# Altium PCB PCB2.PcbDoc
Units mil, origin at the board's own origin, x right, y up, seen from the top; angles counter-clockwise.
Board outline 6000 x 4000 mil, 2 copper layers (Top Layer, Bottom Layer); 97 components, 57 nets, 259 pads, 17 vias.
Unrouted connection lines stored in the file: 18.
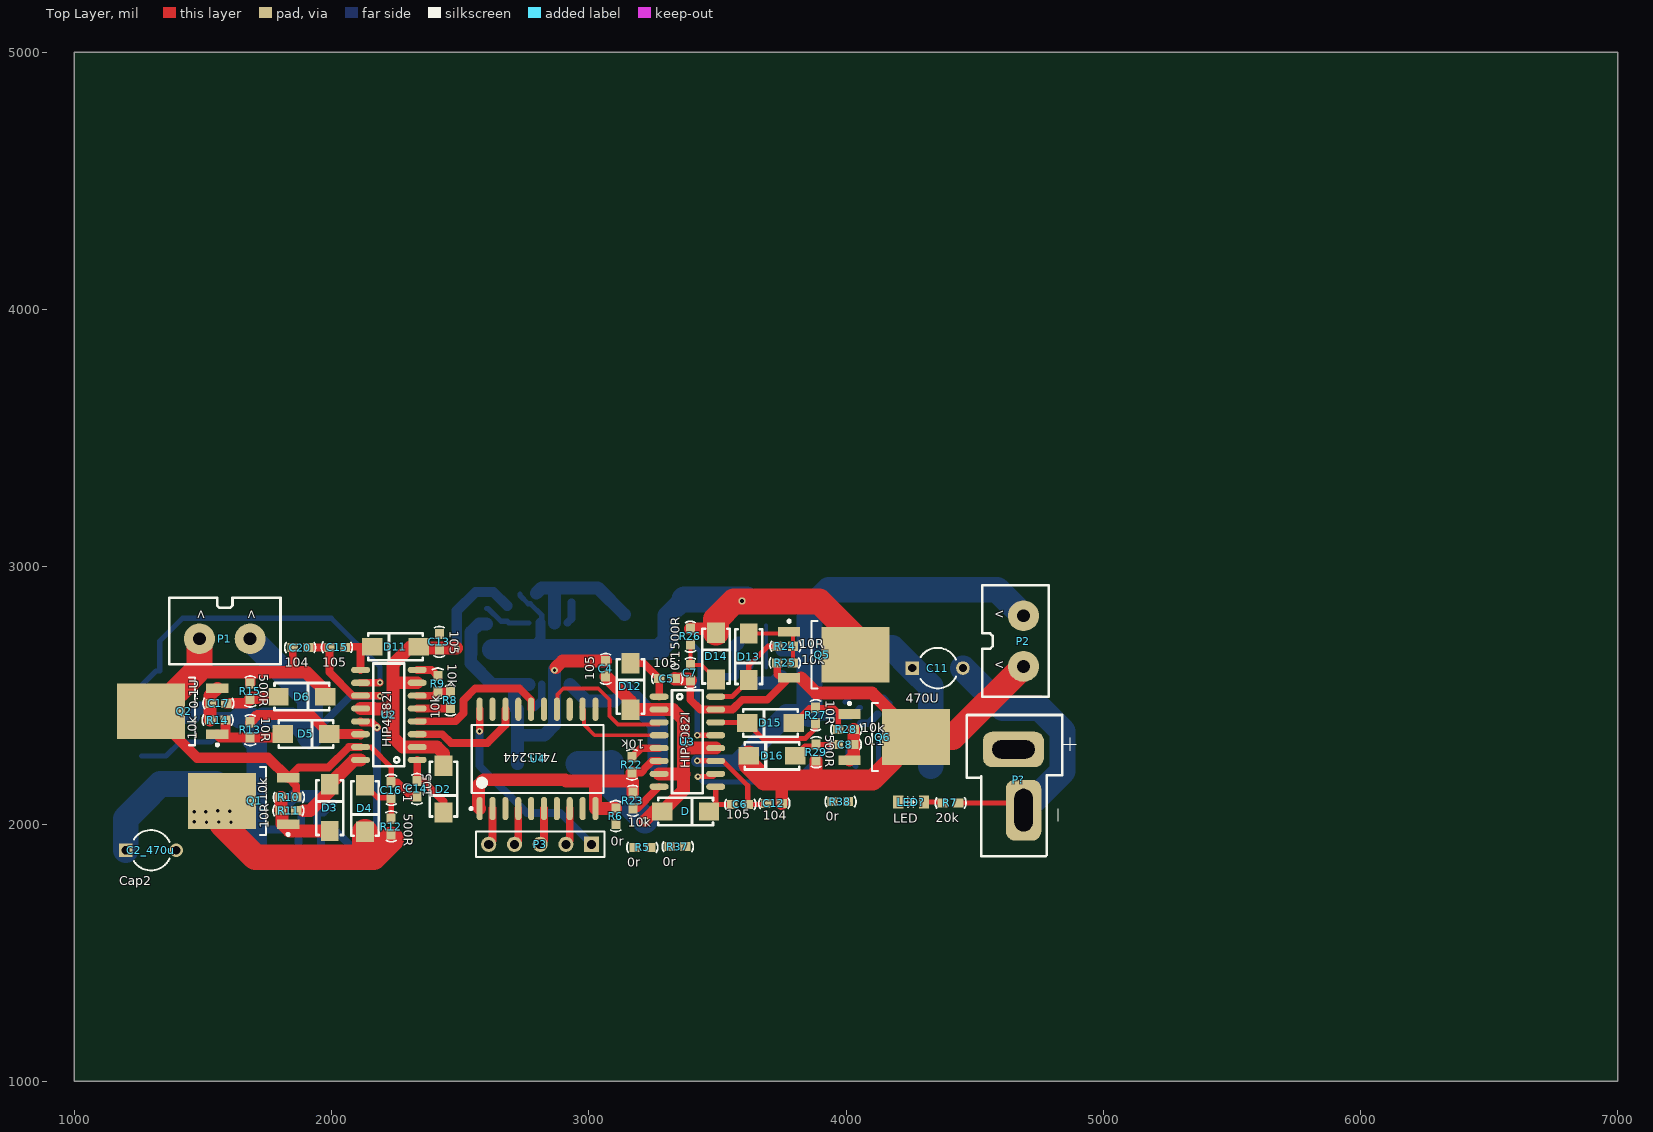
[diagram p0: Top Layer view]
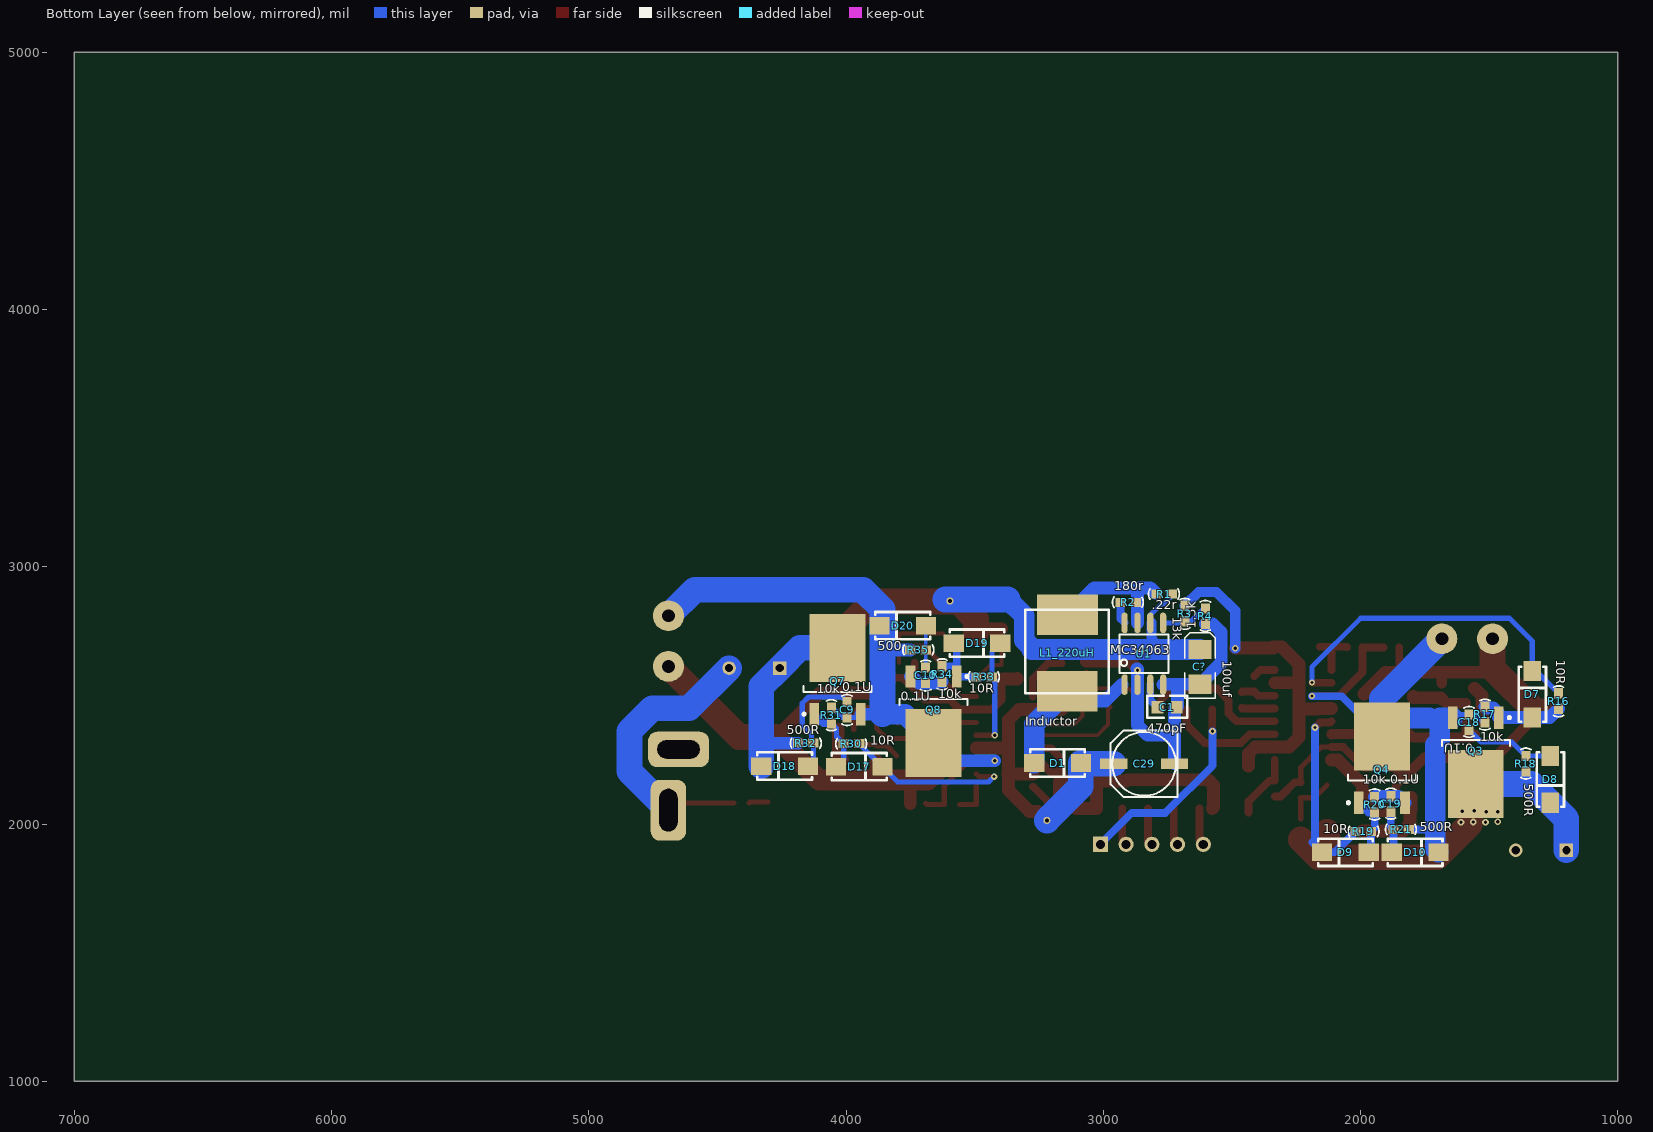
[diagram p1: Bottom Layer view, seen from below]
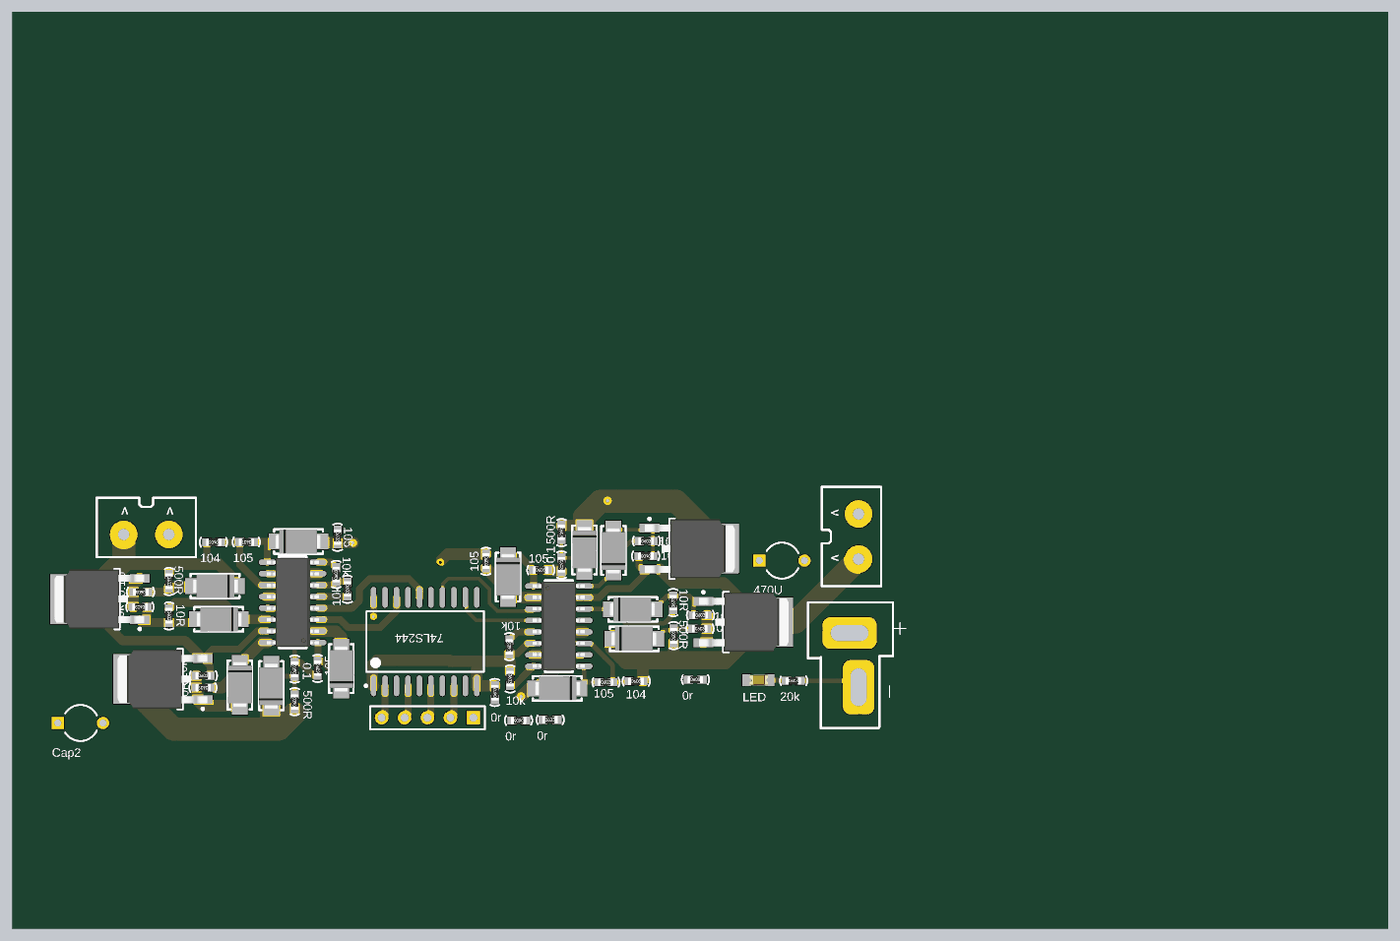
[diagram p2: 3D render of the assembled board from above, using the file's embedded part models]
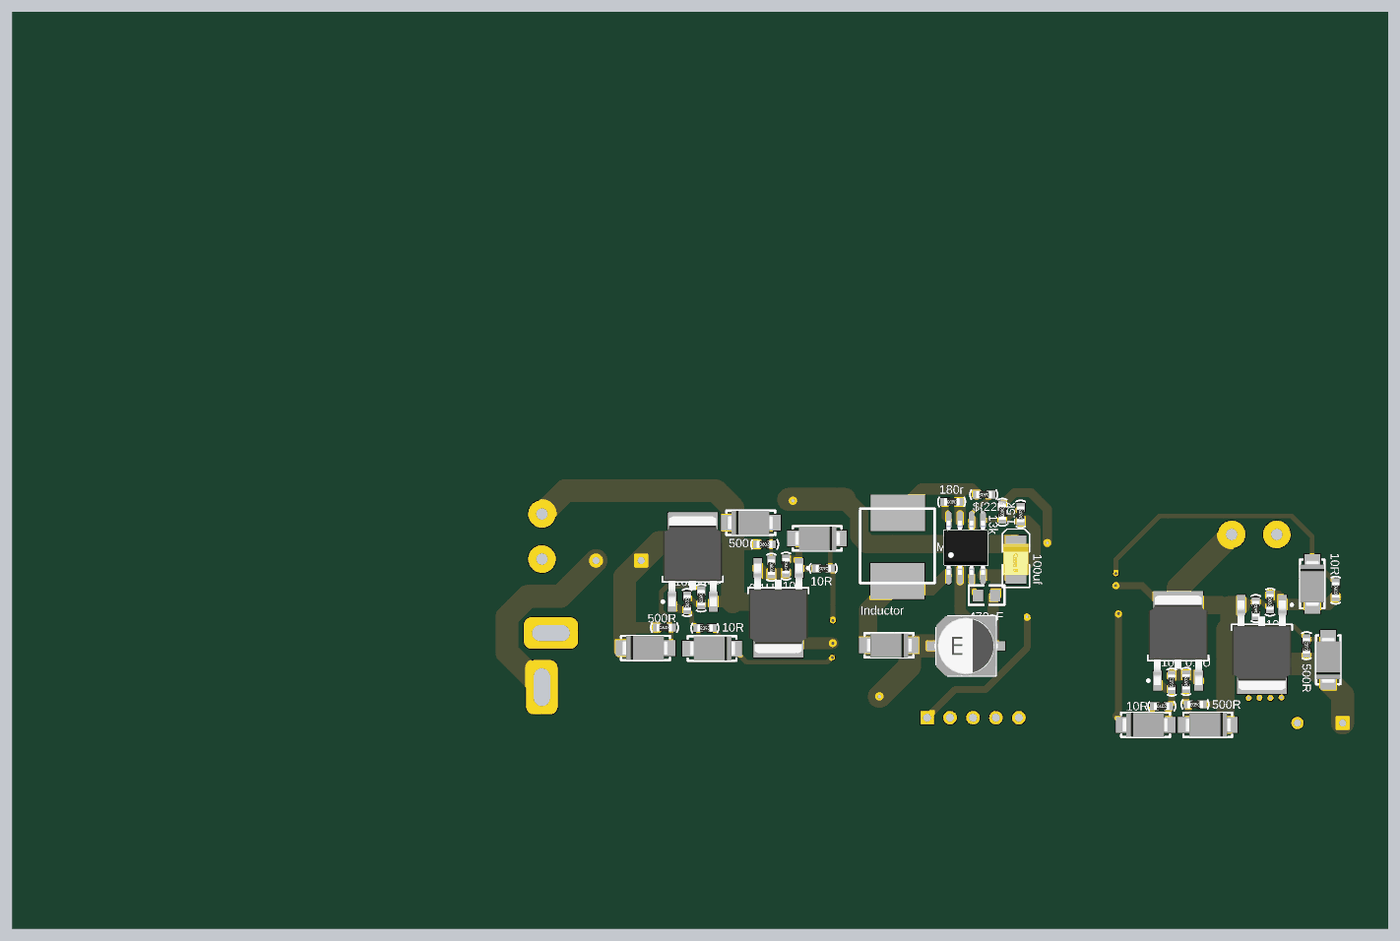
[diagram p3: 3D render of the assembled board from below, using the file's embedded part models]

## Layer stack, top to bottom
Top Solder: solder mask 0.4, Solder Resist, Dk 3.5
Top Layer: signal copper 1.4
Dielectric 1: dielectric 12.6, FR-4, Dk 4.8
Bottom Layer: signal copper 1.4
Bottom Solder: solder mask 0.4, Solder Resist, Dk 3.5

## Board outline
1000,1000 7000,1000 7000,5000 1000,5000

## Design rules (kind name [scope] priority, off if disabled: settings)
Clearance [All] p1: gap=10
PolygonConnect [All] p1: connectstyle=Relief reliefconductorwidth=10 reliefentries=4 polygonreliefangle="90 Angle" airgapwidth=10
RoutingVias [All] p1: holewidth=28 width=50 viastyle="Through Hole" minholewidth=28 minwidth=50 maxholewidth=28 maxwidth=50
SolderMaskExpansion [All] p1: expansion=4
Width [All] p1: maxlimit=100 minlimit=10 preferedwidth=10 minimp=50.000000 maximp=50.000000 favimp=50.000000
30 further rules are at their usual default settings.

## Components (designator, comment, footprint, x,y, rotation, side; value= is the part's Value field where it differs from the comment)
C1 "470pF" 0805 2789,2454 r180 bottom
C2_470u "Cap2" CAPR5-4X5 1298,1898 r0 top
C4 "105" 0603 3066,2609 r270 top
C5 "105" 0603 3299,2565 r0 top
C6 "105" 0603 3583,2076 r0 top
C7 "0.1" 0603 3395,2593 r270 top
C8 "0.1" 0603 3993,2309 r0 top
C9 "0.1U" 0603 3996,2449 r270 bottom
C10 "0.1U" 0603 3690,2583 r270 bottom
C11 "470U" CAPR5-4X5 4356,2606 r0 top
C12 "104" 0603 3715,2080 r0 top
C13 "105" 0603 2419,2714 r270 top
C14 "105" 0603 2332,2142 r270 top
C15 "105" 0603 2027,2687 r180 top
C16 "0.1" 0603 2232,2127 r90 top
C17 "0.1U" 0603 1566,2469 r180 top
C18 "0.1U" 0603 1578,2391 r90 bottom
C19 "0.1U" 0603 1882,2073 r90 bottom
C20 "104" 0603 1884,2686 r180 top
C29 "固态贴片电容" ED6.3 2841,2234 r180 bottom
C? "100uf" "pol cap(10uF)" 2694,2491 r90 bottom
D "" 二极管 3381,2049 r0 top
D1 "" 二极管 3173,2237 r180 bottom
D2 "D" 二极管 2435,2131 r270 top
D3 "" 二极管 1993,2068 r90 top
D4 "" 二极管 2130,2056 r270 top
D5 "" 二极管 1905,2350 r0 top
D6 "" 二极管 1889,2495 r0 top
D7 "" 二极管 1332,2509 r90 bottom
D8 "" 二极管 1262,2169 r270 bottom
D9 "" 二极管 2063,1890 r0 bottom
D10 "" 二极管 1783,1890 r180 bottom
D11 "" 二极管 2244,2689 r180 top
D12 "" 二极管 3162,2539 r90 top
D13 "" 二极管 3622,2646 r270 top
D14 "" 二极管 3495,2657 r90 top
D15 "" 二极管 3702,2393 r180 top
D16 "" 二极管 3708,2265 r180 top
D17 "" 二极管 3944,2223 r180 bottom
D18 "" 二极管 4243,2225 r0 bottom
D19 "" 二极管 3486,2703 r180 bottom
D20 "" 二极管 3784,2771 r0 bottom
L1_220uH "Inductor" 电感8*8 3139,2814 r180 bottom
LED? "LED" LED(0805) 4253,2085 r0 top
P1 "接线端子" 接线端子 1805,2615 r180 top
P2 "接线端子" 接线端子 4795,2931 r270 top
P3 "Header 5" HDR1X5 3011,1921 r180 top
P? "" T型接头 4681,2185 r270 top
Q1 "IR7843" "TO-252  mos管" 1658.19,2089.51 r180 top
Q2 "IR7843" "TO-252  mos管" 1383,2438 r180 top
Q3 "IR7843" "TO-252  mos管" 1551.49,2240.19 r270 bottom
Q4 "IR7843" "TO-252  mos管" 1916.51,2255.81 r90 bottom
Q5 "IR7843" "TO-252  mos管" 3952,2658 r0 top
Q6 "IR7843" "TO-252  mos管" 4187,2338 r0 top
Q7 "IR7843" "TO-252  mos管" 4033,2600 r90 bottom
Q8 "IR7843" "TO-252  mos管" 3659.49,2400.19 r270 bottom
R1 ".22r" 0603 2758,2894 r0 bottom
R2 "180r" 0603 2898,2862 r0 bottom
R3 "13k" 0603 2683,2823 r270 bottom
R4 "1.5k" 0603 2603,2803 r90 bottom
R5 "0r" 0603 3214,1909 r180 top
R6 "0r" 0603 3105,2025 r90 top
R7 "20k" 0603 4401,2082 r0 top
R8 "10k" 0603 2462,2487 r270 top
R9 "10k" 0603 2413,2540 r90 top
R10 "10k" 0603 1828,2104 r0 top
R11 "10R" 0603 1838,2052 r180 top
R12 "500R" 0603 2232,1985 r90 top
R13 "10R" 0603 1684,2371 r270 top
R14 "10k" 0603 1563,2404 r180 top
R15 "500R" 0603 1684,2521 r270 top
R16 "10R" 0603 1230,2483 r270 bottom
R17 "10k" 0603 1516,2431 r270 bottom
R18 "500R" 0603 1357,2229 r90 bottom
R19 "10R" 0603 1994,1971 r180 bottom
R20 "10k" 0603 1945,2070 r90 bottom
R21 "500R" 0603 1837,1979 r0 bottom
R22 "10k" 0603 3168,2225 r90 top
R23 "10k" 0603 3171,2096 r270 top
R24 "10R" 0603 3759,2691 r0 top
R25 "10k" 0603 3768,2626 r180 top
R26 "500R" 0603 3395,2734 r270 top
R27 "10R" 0603 3882,2417 r90 top
R28 "10k" 0603 3995,2368 r0 top
R29 "500R" 0603 3884,2273 r90 top
R30 "10R" 0603 3974,2312 r0 bottom
R31 "10k" 0603 4057,2417 r90 bottom
R32 "500R" 0603 4162,2314 r180 bottom
R33 "10R" 0603 3458,2572 r0 bottom
R34 "10k" 0603 3626,2588 r270 bottom
R35 "500" 0603 3725,2677 r180 bottom
R37 "0r" 0603 3340,1912 r0 top
R38 "0r" 0603 3973,2087 r0 top
U1 "MC34063" SO8NB 2842,2662 r180 bottom
U2 "HIP4082I" HIP4082I 2223,2409 r180 top
U3 "HIP4082I" HIP4082I 3383.53,2335 r0 top
U4 "74LS244" 74LS244D 2801,2253 r90 top

## Footprints (in the part's own frame and the unit in brackets; to place one, negate y for a bottom-side part, rotate by r counter-clockwise, add the part's x,y. Pads: shape width x height; smd on the part's side, far side on the other; paste and mask are expansions set on the pad)
74LS244D [mm] "SOP-20"
  oval 2.3x0.6 smd: 1(-4.9,5.715) 2(-4.9,4.445) 3(-4.9,3.175) 4(-4.9,1.905) 5(-4.9,0.635) 6(-4.9,-0.635) 7(-4.9,-1.905) 8(-4.9,-3.175) 9(-4.9,-4.445) 10(-4.9,-5.715) 11(4.9,-5.715) 12(4.9,-4.445) 13(4.9,-3.175) 14(4.9,-1.905) 15(4.9,-0.635) 16(4.9,0.635) 17(4.9,1.905) 18(4.9,3.175) 19(4.9,4.445) 20(4.9,5.715)
  silkscreen extent -5.02,-6.5 3.35,6.69, body extent -3.8,-6.5 3.8,6.5, height 2.65
0603 [mil]
  rect 40x35 smd: 1(-25,0) 2(35,0)
  silkscreen extent -54,-20 66,20, body extent -28,-16 38,16, height 22
0805 [mil]
  rect 45x50 smd: 1(0,0) 2(75,0)
  silkscreen extent -40,-41 115,44
CAPR5-4X5 [mm] "Capacitor; 2 Leads"
  rect 1.35x1.35 hole 0.8: 1(-2.5,0)
  round 1.35 hole 0.8: 2(2.5,0)
  silkscreen extent -1.69,-2 1.82,2
ED6.3 [mm]
  rect 2.7x1 smd: 1(-3,0) 2(3,0)
  silkscreen extent -3.3,-3.3 3.3,3.3, body extent -3.5,-3.3 3.5,3.3, height 5.2
HDR1X5 [mm] "Connector; Header; 5 Position"
  rect 1.5x1.5 hole 0.9: 1(0,0)
  round 1.5 hole 0.9: 2(2.54,0) 3(5.08,0) 4(7.62,0) 5(10.16,0)
  silkscreen extent -1.27,-1.27 11.43,1.27
HIP4082I [mil]
  oval 74x24 smd: 1(-110,160) 2(-110,110) 3(-110,60) 4(-110,10) 5(-110,-40) 6(-110,-90) 7(-110,-140) 8(-110,-190) 9(110,-190) 10(110,-140) 11(110,-90) 12(110,-40) 13(110,10) 14(110,60) 15(110,110) 16(110,160)
  silkscreen extent -60,-215 60,185, body extent -115,-207 113,179, height 69
LED(0805) [mil]
  rect 40x50 smd: 1(-50,0) 2(50,0)
  silkscreen extent -20,-20 20,20, body extent -37,-24 43,25, height 43
"pol cap(10uF)" [mil]
  rect 75x90 smd: 1(187.5,-70) 2(52.5,-70)
  silkscreen extent -1,-129 252,-11, body extent 51,-125 189,-15, height 75
SO8NB [mil]
  oval 24x80 smd: 1(-75,-120) 2(-25,-120) 3(25,-120) 4(75,-120) 5(75,120) 6(25,120) 7(-25,120) 8(-75,120)
  silkscreen extent -95,-75 95,75, body extent -97,-118 96,118, height 61
"TO-252  mos管" [mm]
  rect 2.2x0.95 smd: 1(-4.4,2.28) 3(-4.4,-2.28)
  rect 6.7x5.5 smd: 2(2.15,0)
  silkscreen extent -4.52,-3.35 -1.6,3.43, body extent -4.9,-3.27 5.04,3.27, height 2.39
T型接头 [mm]
  rrect50% 3.5x6 hole 1.8 slot 4.2 at 90 deg: 1(-2.667,-0.762)
  rrect50% 6x3.5 hole 1.8 slot 4.2 at 0 deg: 2(3.333,0.238)
  silkscreen extent -6.07,-5.36 7.87,5.46
二极管 [mm] "SS-14/M7"
  rect 2x1.75 smd: 1(-2.413,0) 2(2.187,0)
  silkscreen extent -2.81,-1.35 2.59,1.35, body extent -2.61,-1.34 2.49,1.33, height 2.12
接线端子 [mil]
  round 120 hole 50: 1(121.57,-105) 2(318.43,-105)
  silkscreen extent 3,-265 437,-7
电感8*8 [mm]
  rect 6x4 smd: 1(0,0) 2(-0.025,-7.544)
  silkscreen extent -4.17,-7.77 4.09,0.48

## Part data
C1: library part Cap, "Capacitor"
C2_470u: "Capacitor"
C4 C5 C6 C7 C8 C9 C10 C12 C13 C14 C15 C16 C17 C18 C19 C20: library part Cap, "无极电容"
C11: library part Cap2, "Capacitor"
C29: "ED8:470UF  ED6.3:100UF"
C?: library part "pol cap", "通用有极电容"
D D1 D2 D3 D4 D5 D6 D7 D8 D9 D10 D11 D12 D13 D14 D15 D16 D17 D18 D19 D20: library part 二极管
LED?: "发光二极管"
P3: "Header, 5-Pin"
P?: library part 电源接线端子, "电源线"
Q1 Q2 Q3 Q4 Q5 Q6 Q7 Q8: library part NMOS-2, "N-Channel Power MOSFET"
R1 R2 R3 R4 R5 R6 R7 R8 R9 R10 R11 R12 R13 R14 R15 R16 R17 R18 R19 R20 R21 R22 R23 R24 R25 R26 R27 R28 R29 R30 R31 R32 R33 R34 R35 R37 R38: library part R

## Free pads (board coordinates)
  round 28 hole 16: 0(3596,2867) 1(3219,2014)

## Via types
v1: diameter 26, hole 13, Top Layer to Bottom Layer, 14 vias
v2: diameter 24, hole 12, Top Layer to Bottom Layer, 3 vias

## Nets (pads, with @x,y where several pads share a name; then routed paths per layer and width w, separated by ;. In a path a pad name is that pad's centre, name@x,y a point inside that pad or via, vN(x,y) a via of type N, cw(c..) or ccw(c..) an arc to the next point about the centre after c; other vN are vias at no path point)
5V: P3.1 U4.20 | length 780.7
  Top Layer w30: v1@2576,2362 U4.20
  Bottom Layer w30: v1(2575,2361) 2575,2227 2759,2043 2889,2043 P3.1
12V: C4.2 C13.2 C29.1 D1.2 D2.1 D11.1 D12.1 D.1 pad.1 R3.1 U2.2 U2.7 U2.12 U3.2 U3.7 U3.12 | length 2942.6
  Top Layer w50: U2.12 2166.29,2449 2166.29,2447 2235,2447 2239,2451 ; 2245,2549 U2.7 ; D2.1 2435,2274 2410,2299 U2.2 2277,2299 2239,2337 2239,2451 ; v1@2487,2684 2339,2684 D11.1 2307,2689 2239,2621 2239,2451 ; C4.2 3162,2478 D12.1 3163,2445 U3.2 3327,2445 3368,2404 3368,2299 ; pad.1 3254,2049 D.1 3368,2131 3368,2299 ; U3.7 3371,2195 ; U3.12 3372,2295 3368,2299
  Bottom Layer w40: v1(2487,2683) 2487,2829 2560,2902 2629,2902 R3.1
  Bottom Layer w100: C29.1 3083.9,2234 D1.2 3086.9,2146.1 pad.1
AGND: C1.2 C2_470u.2 C4.1 C11.2 C13.1 C29.2 C?.2 P?.2 R4.1 R5.2 R7.2 U1.2 U1.4 | length 2478.1
  Top Layer w20: R7.2 4662.15,2082 P?.2
  Top Layer w50: v1@2873,2609 2898,2634 C4.1
  Bottom Layer w50: R4.1 2574,2778 2542,2746 2542,2660.22 2541,2659.22 2541,2626.5 C?.2 2711,2543.5 ; C29.2 2722.89,2345 ; U1.4 2765.5,2543.5 2711,2543.5 ; v1@2869,2603.5 2867,2601.5 U1.2 2867,2385 2827,2345 2722.89,2345 ; 2711,2543.5 2711,2457 C1.2 2722.89,2445.11 2722.89,2345
  Bottom Layer w100: C11.2 4610.43,2450 4753,2450 4842,2361 4842,2205.41 P?.2
  other v1: 2867,2598
DGND: R6.2 R8.1 R9.1 R22.1 R23.1 U2.6 U3.6 U4.1 U4.10 | length 1235.5
  Top Layer w30: U2.6 2397,2499 R9.1 2459,2515 R8.1 ; R22.1 3204,2200 3211.53,2207.53 3211.53,2210.33 3246.2,2245 U3.6
  Top Layer w50: U4.1 2571,2065.09 2571,2151 2592,2172 2907,2172 2912,2167 3041,2167 ; R6.2@3104.91,2060.09 U4.10 3026,2152 3041,2167 ; R22.1 3167,2199 3167,2167 ; R23.1 3171,2163 3167,2167 ; 3041,2167 3167,2167
GND: R5.1 R6.1 R37.1 R38.1
NetC1_1: C1.1 U1.3 | length 99.6
  Bottom Layer w30: C1.1 2817,2482 U1.3
NetC5_1: C5.1 D12.2 U3.1 | length 207.1
  Top Layer w30: D12.2 3213.9,2625.1 C5.1 3273.53,2564.53 U3.1
NetC5_2: C5.2 C7.2 C12.2 D16.2 P2.2 Q5.3 Q6.2 R25.2 R29.1 U3.15 | length 2751.2
  Top Layer w30: C7.2 3395,2483 3433,2445 U3.15 3558.72,2445 3596.72,2483 3693.54,2483 Q5.3 ; R25.2 3733,2583 3747.76,2568.24 Q5.3 ; 3824.76,2568.24 Q5.3
  Top Layer w50: C5.2 3334,2563 3390,2563 C7.2 ; C12.2 3750,2169 ; 3824.76,2568.24 3884,2509 4100.65,2509 Q6.2 ; 3880,2171 3884,2175 R29.1
  Top Layer w80: D16.2 3621.9,2231.1 3682,2171 3880,2171 4104.65,2171 Q6.2
  Top Layer w100: Q6.2 4415.43,2338 P2.2
NetC6_1: C6.1 D.2 U3.9 | length 134.3
  Top Layer w20: U3.9 3493.53,2075.42 3494.1,2076 C6.1
NetC6_2: C6.2 C9.2 C12.1 D20.2 P2.1 Q7.3 Q8.2 R31.2 R35.1 U3.11 | length 2510.6
  Top Layer w20: v1(3422,2246) 3492.53,2246 U3.11 ; U3.11@3521,2246 3618,2149 C6.2 3686,2076 C12.1
  Bottom Layer w20: Q7.3 3956.01,2414 C9.2 4017,2414 4019.5,2416.5 4019.5,2420.28 4051.22,2452 R31.2
  Bottom Layer w50: v1(3422,2246) Q8.2@3589.95,2246 ; R35.1 3856,2677 3858,2675 ; 3858,2426.77 Q7.3@3942.5,2426.77
  Bottom Layer w80: Q8.2@3589.95,2246 Q8.2 3770.72,2426.77 3858,2426.77
  Bottom Layer w100: 3858,2426.77 3858,2675 3858,2834.66 3934.34,2911 4588.43,2911 P2.1
NetC7_1: C7.1 D14.1 R26.2 | length 204.2
  Top Layer w15: R26.2 C7.1 3439,2618 D14.1
NetC8_1: C8.1 D16.1 R29.2 | length 183.2
  Top Layer w20: D16.1 3841,2303 3879,2303 R29.2 3885,2309 C8.1
NetC9_1: C9.1 D18.1 R32.2 | length 463.6
  Bottom Layer w20: C9.1 4016,2494 4145.83,2494 4170,2469.83 4170,2383.5 4134,2347.5 4134,2321 R32.2 4127,2246 D18.1
NetC10_1: C10.1 D20.1 R35.2 | length 163.4
  Bottom Layer w15: D20.1 3690,2770 R35.2 C10.1
NetC14_1: C14.1 D2.2 U2.1 | length 259.2
  Top Layer w30: U2.1 2333,2168 2355,2168 2435,2088 D2.2
NetC14_2: C14.2 C16.2 C20.2 D6.2 P1.2 Q1.3 Q2.2 R10.2 R15.1 U2.15 | length 2456.9
  Top Layer w20: U2.15 2153,2299 2232,2220 C16.2
  Top Layer w30: 1843,2590 1849,2596 C20.2 ; R10.2 1863,2147.69 Q1.3 1872.14,2220 1988.19,2220 2067.19,2299 U2.15 ; C16.2 2256,2162 2311,2107 C14.2
  Top Layer w40: Q2.2 1478.35,2258 1752.69,2258 Q1.3 ; R15.1 1684,2589 1685,2590
  Top Layer w50: 1471.6,2590 1685,2590 1843,2590 1902.1,2590 D6.2@1986.1,2506
  Top Layer w100: Q2.2 1319.6,2438 1471.6,2590 1486.57,2604.97 P1.2
NetC15_1: C15.1 D11.2 U2.9 | length 200
  Top Layer w30: C15.1 2054,2689 2105,2689 ; U2.9 2113,2681 2105,2689 ; D11.2 2105,2689
NetC15_2: C15.2 C18.2 C20.1 D10.2 P1.1 Q3.3 Q4.2 R17.2 R21.1 U2.11 | length 2279.2
  Top Layer w30: C20.1 1991,2686 C15.2 1992,2590 2083,2499 U2.11 2187,2499 v2(2189,2497)
  Bottom Layer w20: R17.2 1521.78,2396 1551.78,2426 C18.2 1628.67,2426 Q3.3
  Bottom Layer w30: 1709.76,1990 1720.76,1979 R21.1 ; Q4.2 2073.05,2497 v2(2189,2497)
  Bottom Layer w80: Q3.3 1642.67,2412 1692,2412 1692,2325.9 1709.76,2308.14 1709.76,1990 1709.76,1902.86 D10.2 ; 1732,2412 1844.97,2412 Q4.2
  Bottom Layer w100: P1.1 1916.51,2486.91 Q4.2
NetC16_1: C16.1 D4.1 R12.2 | length 204.3
  Top Layer w20: D4.1 2179,2102 C16.1 R12.2
NetC17_1: C17.1 D6.1 R15.2 | length 216.1
  Top Layer w40: C17.1 1667,2469 R15.2
  Top Layer w50: R15.2 1689,2491 1794,2491 D6.1
NetC18_1: C18.1 D8.1 R18.2 | length 358.2
  Bottom Layer w20: D8.1 R18.2 1412,2319 1531,2319 C18.1
NetC19_1: C19.1 D10.1 R21.2 | length 164.6
  Bottom Layer w30: D10.1 1872,1896 R21.2 1882,1989 C19.1
NetD1_1: D1.1 L1_220uH.2 U1.1 | length 589.1
  Bottom Layer w50: U1.1@2927,2543 2992,2478 3101,2478 L1_220uH.2
  Bottom Layer w80: L1_220uH.2 3268,2389 D1.1
NetD3_1: D3.1 Q1.1 R10.1 R11.2 | length 302.5
  Top Layer w50: R10.1 R11.2 1808,2047 1808,1999.5 1834.5,1973 D3.1
NetD3_2: D3.2 R11.1 U2.16 | length 318.9
  Top Layer w50: 1891.17,2051.5 1916.5,2051.5 1993,2128 D3.2 2087.9,2249 U2.16
NetD5_1: D5.1 Q2.1 R13.2 R14.1 | length 319.6
  Top Layer w40: Q2.1 1568.46,2336 R13.2 1796,2336 D5.1 ; Q2.1@1588,2349 R14.1
NetD5_2: D5.2 R13.1 U2.14 | length 471.7
  Top Layer w40: R13.1 1712,2424 1917.1,2424 D5.2 2112,2350 U2.14
NetD7_1: D7.1 Q3.1 R16.2 R17.1 | length 326.9
  Bottom Layer w50: R16.2 1264,2414 D7.1 1332.58,2413.42 Q3.1 1463.5,2415.19 1463.5,2430.5 1484,2451 1511,2451 R17.1
NetD7_2: D7.2 R16.1 U2.10 | length 1361.5
  Top Layer w30: U2.10 2187,2549 v2(2188,2550)
  Bottom Layer w20: R16.1 1317.1,2595.1 D7.2 1332,2711 1421,2800 1999,2800 2188,2611 v2(2188,2550)
NetD9_1: D9.1 Q4.1 R19.2 R20.1 | length 241.4
  Bottom Layer w30: D9.1 1959,1899 R19.2 1945,1985 R20.1 1968.69,2045 Q4.1
NetD9_2: D9.2 R19.1 U2.13 | length 743.3
  Top Layer w30: U2.13 2117,2395 2157,2395 v1(2177,2375)
  Bottom Layer w30: R19.1 2100,1890 D9.2 2188,1928.9 2177,1939.9 v1(2177,2375)
NetD13_1: D13.1 Q5.1 R24.2 R25.1 | length 287.4
  Top Layer w15: D13.1 3794,2741 R24.2 3794,2627 R25.1
NetD13_2: D13.2 R24.1 U3.16 | length 354.5
  Top Layer w20: U3.16 3557.1,2495 D13.2 3622,2616 3697,2691 R24.1
NetD15_1: D15.1 Q6.1 R27.2 R28.1 | length 308.2
  Top Layer w20: D15.1 3856,2452 R27.2 3954,2452 3978.24,2427.76 Q6.1 ; R28.1 3970,2425
NetD15_2: D15.2 R27.1 U3.14 | length 447.5
  Top Layer w20: U3.14 D15.2@3613.9,2395 ; D15.2 3675.9,2333 3843,2333 3882,2372 R27.1
NetD17_1: D17.1 Q7.1 R30.2 R31.1 | length 281.5
  Bottom Layer w20: D17.1 4009,2253 R30.2 4037,2340 4037,2372 R31.1
  Bottom Layer w30: R31.1 4087.99,2392 Q7.1
NetD17_2: D17.2 R30.1 U3.10 | length 669.8
  Top Layer w20: v2(3424,2184) 3482.53,2184 U3.10
  Bottom Layer w20: v2@3424,2186 3446.35,2163.65 3798.55,2163.65 D17.2 3860,2223 R30.1
NetD19_1: D19.1 Q8.1 R33.2 R34.1 | length 260.8
  Bottom Layer w30: R33.2 Q8.1@3568.31,2572 ; Q8.1 D19.1@3569.72,2691.72 ; Q8.1@3574.72,2613 R34.1
  Bottom Layer w50: D19.1@3569.72,2691.72 D19.1
NetD19_2: D19.2 R33.1 U3.13 | length 447.8
  Top Layer w20: v1(3422,2345) U3.13
  Bottom Layer w20: D19.2 3433,2669.9 R33.1 3422,2561 v1(3422,2345)
NetL1_220uH_1: L1_220uH.1 R1.2 R2.1 U1.7 | length 533.9
  Bottom Layer w50: R1.2@2795.82,2896.82 2817,2918 2860,2918 ; U1.7 2867,2911 2860,2918 ; L1_220uH.1 3035,2918 2860,2918
NetLED?_2: LED?.2 R7.1 | length 74.2
  Top Layer w20: LED?.2 4373,2085 R7.1
NetR2_2: R2.2 U1.8 | length 86.6
  Bottom Layer w30: U1.8 2933,2798 R2.2
NetR3_2: R3.2 R4.2 U1.5 | length 187.2
  Bottom Layer w20: R4.2 2608.78,2838 2658.78,2788 R3.2 2689,2782 U1.5
NetR8_2: R8.2 U2.5 | length 130.2
  Top Layer w30: U2.5 2459,2449 R8.2
NetR9_2: R9.2 U2.8 | length 89.9
  Top Layer w30: U2.8 2389,2599 R9.2
NetR22_2: R22.2 U3.5 | length 120
  Top Layer w30: R22.2 3203,2295 U3.5
NetR23_2: R23.2 U3.8 | length 137.7
  Top Layer w30: R23.2 3189.53,2061 3221.63,2093.1 3221.63,2093.8 3272.83,2145 U3.8
PGND: C8.2 C10.2 C17.2 C19.2 Q2.3 Q4.3 Q6.3 Q8.3 R14.2 R20.2 R28.2 R34.2 R37.2 R38.2 | length 527.8
  Top Layer w50: R14.2 1528,2499.54 Q2.3 ; Q6.3 4030,2264.46 R28.2
  Bottom Layer w50: Q4.3 1852.16,2108 C19.2 1942,2108 R20.2 ; R34.2 3631,2548 C10.2 3717,2548 3742.41,2573.42 Q8.3
PWM1: P3.5 U4.2 | length 145.3
  Top Layer w30: P3.5 2626,1936 U4.2
PWM2: P3.4 U4.4 | length 145.3
  Top Layer w30: P3.4 2726,1936 U4.4
PWM3: P3.3 U4.6 | length 145.3
  Top Layer w30: P3.3 2826,1936 U4.6
PWM4: P3.2 U4.8 | length 145.3
  Top Layer w30: P3.2 2926,1936 U4.8
PWMOUT1: U2.3 U4.18 | length 447
  Top Layer w30: U2.3 2430.71,2349 2464.71,2315 2606,2315 2676,2385 U4.18
PWMOUT2: U2.4 U4.16 | length 580.3
  Top Layer w30: U2.4 2482,2399 2513,2430 2513,2481 2559,2527 2730.44,2527 2776,2481.44 U4.16
PWMOUT3: U3.3 U4.14 | length 566.9
  Top Layer w15: U4.14@2878,2444.91 2878,2504 2901,2527 3037,2527 3081,2483 3081,2420 3113.87,2387.13 3273.53,2387.13 U3.3
PWMOUT4: U3.4 U4.12 | length 381.3
  Top Layer w15: U4.12@2971.54,2454.46 2981.46,2444.54 2981.46,2386.54 3023,2345 U3.4
VCC: C2_470u.1 C11.1 C?.1 D4.2 D8.2 D14.2 D18.2 LED?.1 P?.1 pad.0 Q1.2 Q3.2 Q5.2 Q7.2 R1.1 R12.1 R18.1 R26.1 R32.1 U1.6 | length 4503.8
  Top Layer w15: D14.2@3479.1,2759 D14.2
  Top Layer w50: R26.1 D14.2@3479.1,2759
  Top Layer w100: Q1.2 1573.54,2001.46 1704,1871 2163,1871 ; D4.2 2130,1904 2163,1871 ; R12.1@2232,1940 2163,1871 ; D14.2 3495,2796 3564,2865 3896,2865 4036.65,2724.35 Q5.2
  Bottom Layer w20: R1.1 2733,2888.22 2764.72,2856.5 2772.5,2856.5 2817,2812 U1.6
  Bottom Layer w40: 2797,2703.39 2812,2718.39 U1.6@2812,2782
  Bottom Layer w50: R32.1 4325.1,2314 4329.1,2318
  Bottom Layer w80: C?.1 3277.5,2678.5 3277.5,2684.94 3307.11,2714.55 3307.11,2809.11 3371,2873
  Bottom Layer w100: C2_470u.1 1199.57,2020.47 D8.2 1334.64,2155.54 Q3.2 ; 3371,2873 3614,2873 ; Q7.2 4178.93,2684.65 C11.1 4329.1,2534.47 4329.1,2318 D18.2
  other v1: 1514,2007 1609,2007 1562,2008 1466,2009 1466,2048 1511,2048 1604,2050 1558,2051
pads on no net: U4.3 U4.5 U4.7 U4.9 U4.11 U4.13 U4.15 U4.17 U4.19

## Text inside footprints (layer, text, board x,y; h text height)
P1: Top Overlay "V" at 1506.26,2838.11 h50 r180; Top Overlay "V" at 1703.11,2838.11 h50 r180
P2: Top Overlay "V" at 4571.89,2632.26 h50 r270; Top Overlay "V" at 4571.89,2829.11 h50 r270